# Altium PCB Boost.PcbDoc
Units mm, origin at the board's own origin, x right, y up, seen from the top; angles counter-clockwise.
Board outline 62.99 x 26.8 mm, 2 copper layers (Top Layer, Bottom Layer); 20 components, 12 nets, 51 pads, 2 vias.
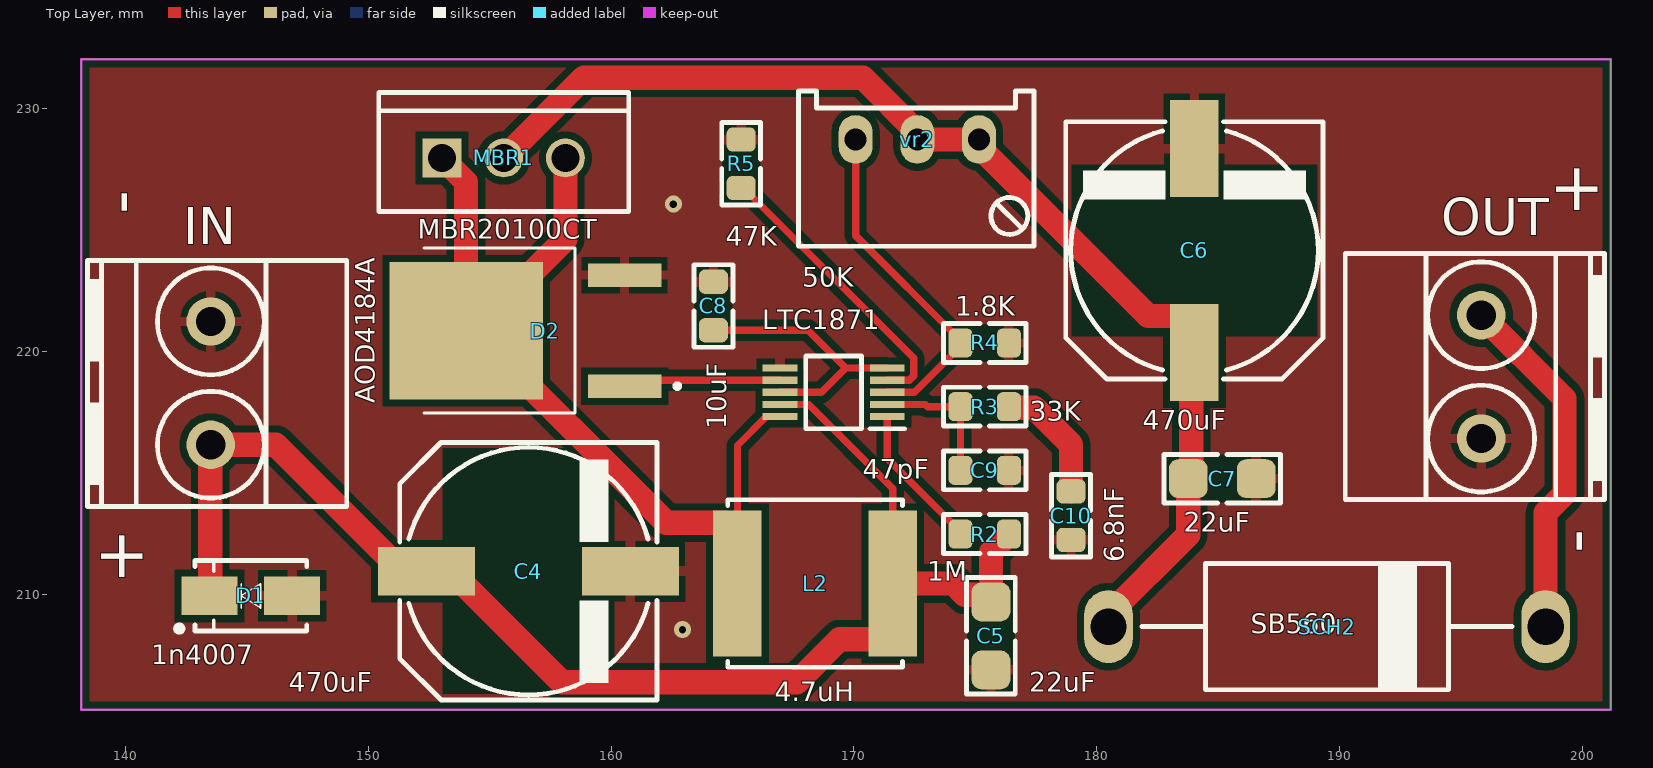
[diagram p0: Top Layer view]
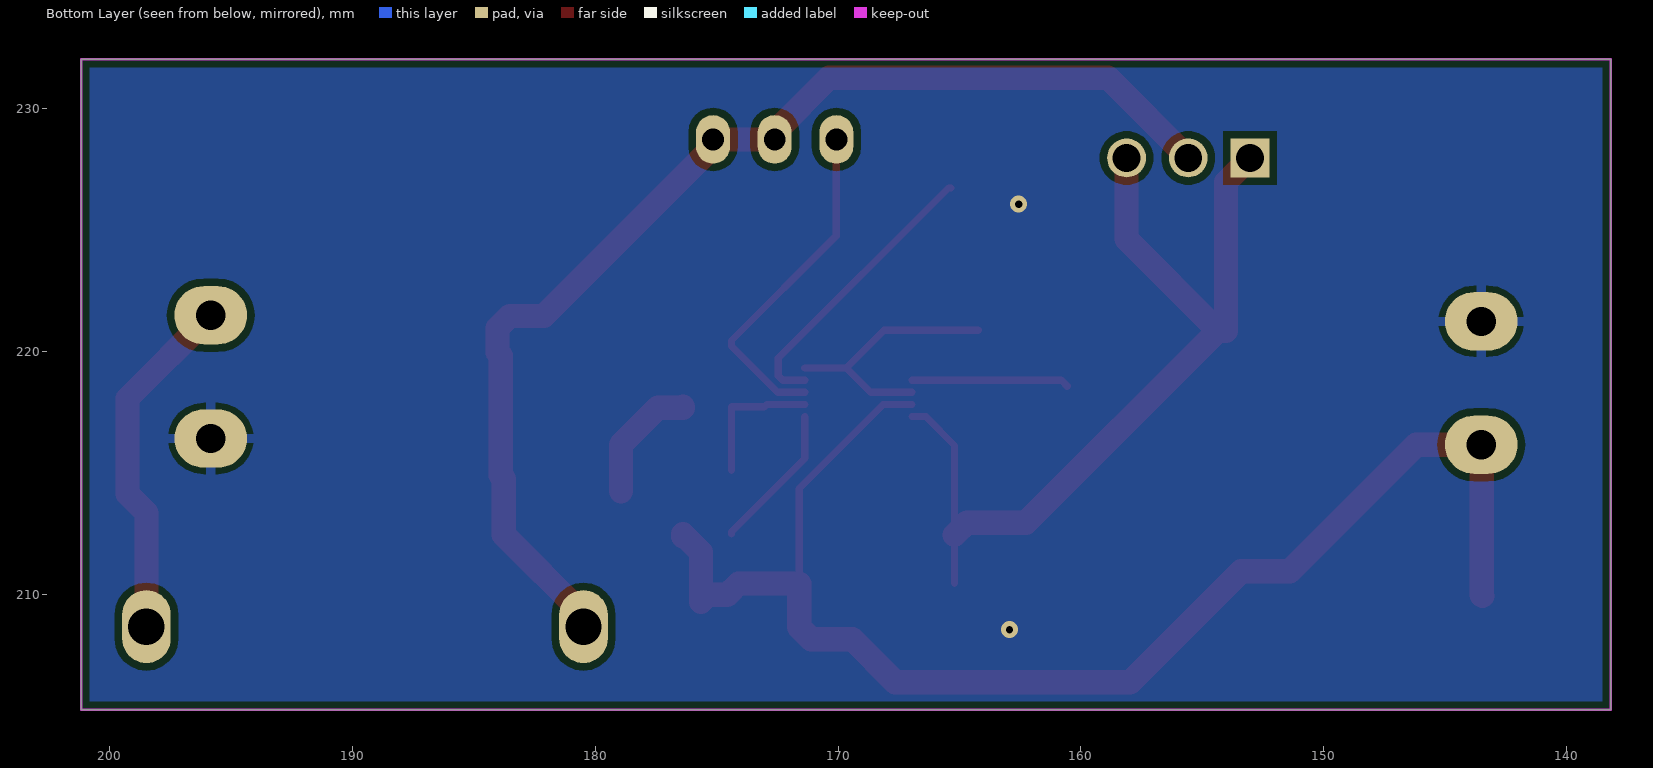
[diagram p1: Bottom Layer view, seen from below]
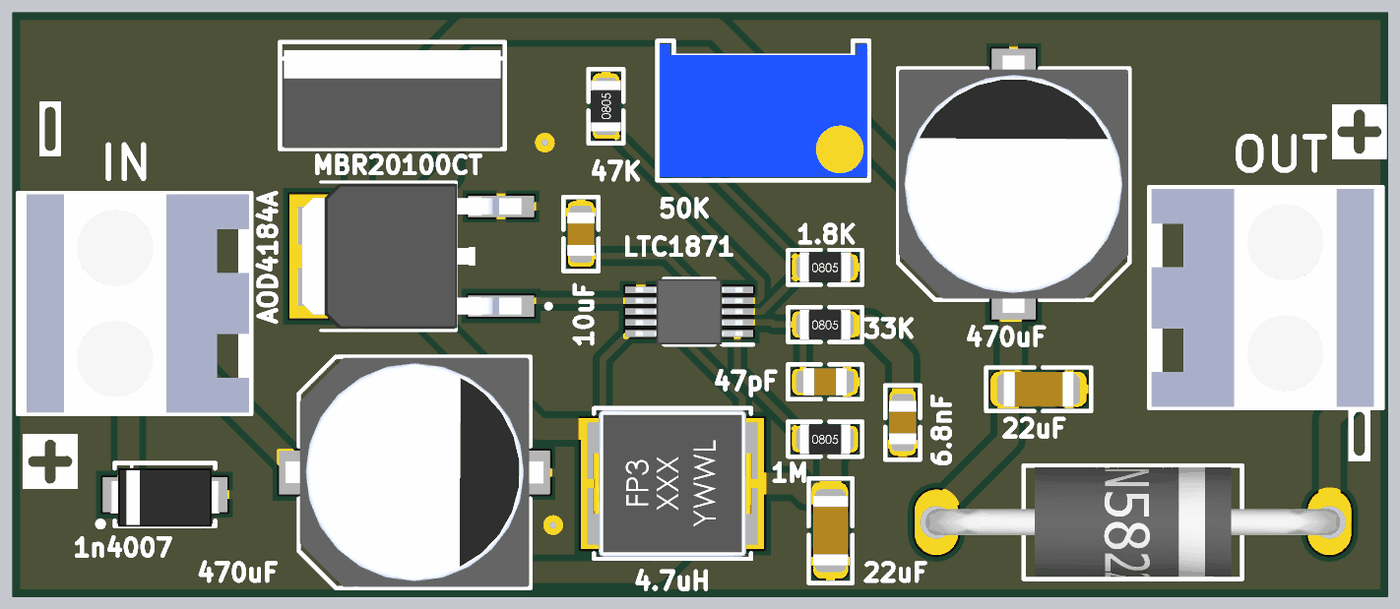
[diagram p2: 3D render of the assembled board from above, using the file's embedded part models]

## Layer stack, top to bottom
Top Solder: solder mask 0.0102, Solder Resist, Dk 3.5
Top Layer: signal copper 0.0356
Dielectric 1: dielectric 0.32, FR-4, Dk 4.8
Bottom Layer: signal copper 0.0356
Bottom Solder: solder mask 0.0102, Solder Resist, Dk 3.5

## Board outline
138.176,205.232 138.176,232.029 201.168,232.029 201.168,205.232

## Design rules (kind name [scope] priority, off if disabled: settings)
Clearance Clearance_2 [InNamedPolygon('GND_L02_P003')] p1: gap=0.3 ignorepadtopadclearanceinfootprint=FALSE
Clearance Clearance_1 [InNamedPolygon('GND_L01_P002')] p2: gap=0.3 ignorepadtopadclearanceinfootprint=FALSE
Clearance [All] p3: gap=0.2 ignorepadtopadclearanceinfootprint=FALSE
PolygonConnect PolygonConnect_5 [All vs IsNamedPolygon('GND_L02_P003')] p1: connectstyle=Relief reliefconductorwidth=0.4 reliefentries=4 polygonreliefangle="90 Angle" airgapwidth=0.254
PolygonConnect PolygonConnect_4 [All vs IsNamedPolygon('GND_L01_P002')] p2: connectstyle=Relief reliefconductorwidth=0.4 reliefentries=4 polygonreliefangle="90 Angle" airgapwidth=0.254
PolygonConnect PolygonConnect_3 [All vs IsNamedPolygon('GND_L01_P002')] p3: connectstyle=Relief reliefconductorwidth=0.254 reliefentries=4 polygonreliefangle="90 Angle" airgapwidth=0.4
PolygonConnect PolygonConnect_2 [All vs IsNamedPolygon('NONET_L01_P-001')] p4: connectstyle=Direct reliefconductorwidth=0.254 reliefentries=4 polygonreliefangle="90 Angle" airgapwidth=0.254
PolygonConnect PolygonConnect_1 [All vs IsNamedPolygon('NONET_L01_P-001')] p5: connectstyle=Direct reliefconductorwidth=0.254 reliefentries=4 polygonreliefangle="90 Angle" airgapwidth=0.254
PolygonConnect [All] p6: connectstyle=Relief reliefconductorwidth=0.254 reliefentries=4 polygonreliefangle="90 Angle" airgapwidth=0.254
RoutingVias [All] p1: holewidth=0.3 width=0.7 viastyle="Through Hole" minholewidth=0.3 minwidth=0.7 maxholewidth=0.3 maxwidth=0.7
SolderMaskExpansion [All] p1: expansion=0.102 istentingtop=FALSE
Width [All] p1: maxlimit=2 minlimit=0.2 preferedwidth=0.5 minimp=50.000000 maximp=50.000000 favimp=50.000000
30 further rules are at their usual default settings.

## Components (designator, comment, footprint, x,y, rotation, side; value= is the part's Value field where it differs from the comment)
C4 "470uF" C_EL_10_10 156.591,210.947 r0 top
C5 "22uF" C1206 175.641,208.28 r90 top
C6 "470uF" C_EL_10_10 184.023,224.155 r90 top
C7 "22uF" C1206 185.166,214.757 r180 top
C8 "10uF" C0805 164.211,221.869 r90 top
C9 "47pF" C0805 175.387,215.098 r0 top
C10 "6.8nF" C0805 178.943,213.233 r270 top
D1 "1n4007" DIOM4629X24N 145.161,209.931 r180 top
D2 "AOD4184A" DPAK228P994X240-4N 156.464,220.853 r90 top
IN "CONN_TB2" TBG_2 143.51,218.694 r90 top
L2 "4.7uH" L_7 168.402,210.439 r0 top
LTC1871 "LTC1871HMS#PBF" SOP50P490X110-10N 169.164,218.313 r180 top
MBR1 "MBR20100CT" TO220 155.575,227.965 r0 top
OUT "CONN_TB2" TBG_2 195.834,218.948 r270 top
R2 "1M" R0805 175.387,212.474 r0 top
R3 "33K" R0805 175.387,217.721 r0 top
R4 "1.8K" R0805 175.387,220.345 r0 top
R5 "47K" R0805 165.354,227.727 r90 top
SCH2 "SB560" D_AX07_DO27 189.484,208.661 r0 top
vr2 "50K" POT_3296W 172.609,228.727 r180 top

## Footprints (in the part's own frame and the unit in brackets; to place one, negate y for a bottom-side part, rotate by r counter-clockwise, add the part's x,y. Pads: shape width x height; smd on the part's side, far side on the other; paste and mask are expansions set on the pad)
C0805 [mm] "CHIP Capacitor, 2.0X1.3mm, 0805"
  rrect50% 1x1.2 smd paste-5 mask+0.075: 1(-1,0) 2(1,0)
  Top Layer pour cut-out: -0.5,0.8 0.5,0.8 0.5,-0.8 -0.5,-0.8
  silkscreen extent -1.7,-0.8 1.7,0.8, body extent -1,-0.62 1,0.63, height 1
C1206 [mm] "CHIP Capacitor, 3.2X1.6mm, 1206"
  rrect50% 1.6x1.6 smd paste-5 mask+0.075: 1(-1.4,0) 2(1.4,0)
  Top Layer pour cut-out: -0.8,1 -0.8,-1 0.8,-1 0.8,1
  silkscreen extent -2.4,-1 2.4,1, body extent -1.6,-0.8 1.6,0.8, height 1
C_EL_10_10 [mm] "Electrolytic Cap, 10.3mm, L: 10mm"
  rect 4x2 smd: 1(-4.2,0) 2(4.2,0)
  Top Layer pour cut-out: -3.556,5.08 -3.556,-5.08 3.556,-5.08 3.556,5.08
  silkscreen extent -5.3,-5.3 5.3,5.3, body extent -5.9,-5.25 5.9,5.25, height 10.5
D_AX07_DO27 [mm] "DIODE 0.7 INCH SPACING DO-201AD, DO-27"
  oval 2x3 hole 1.5: 1(-9,0) 2(9,0)
  silkscreen extent -7.62,-2.6 7.62,2.6, body extent -9.49,-2.5 9.49,2.52, height 5.01
DIOM4629X24N [mm] "Molded Diode, 2-Leads, Body 4/60x2/90mm, IPC Medium Density-Design:Abbas Basereh"
  rect 2.3x1.6 smd: 1(-1.7,0) 2(1.7,0)
  silkscreen extent -2.3,-1.45 3.07,1.47, body extent -2.5,-1.22 2.5,1.48, height 2.2
DPAK228P994X240-4N [mm]
  rect 0.97x3.02 smd: 1(-2.286,-4.09) 3(2.286,-4.09)
  rect 5.67x6.32 smd paste-4: 4(0,2.44)
  silkscreen extent -3.4,-6.36 3.4,4.18, body extent -3.3,-5.02 3.3,5.02, height 2.4
L_7 [mm] "INDUCTOR, 7.2X6.9mm, 7.1X6.5mm, SPM6530"
  rect 2x6 smd paste-3: 1(-3.2,0) 2(3.2,0)
  silkscreen extent -3.6,-3.45 3.6,3.45, body extent -3.62,-3.35 3.63,3.35, height 3
POT_3296W [mm] "POT, TRIM, 10.0X5.0mm, pitch: 2.5mm 3299W 3296W S64W"
  oval 1.4x2 / inner round 1.2 / far side oval 1.4x2 hole 0.9: 1(-2.54,0) 2(0,0) 3(2.54,0)
  silkscreen extent -4.8,-2 4.9,4.4, body extent -4.73,-1.85 4.8,4.25, height 11.56
R0805 [mm] "CHIP RESISTOR 1/8 WATT ,2.0X1.3mm, 0805, 2012"
  rrect50% 1x1.2 smd paste-5 mask+0.075: 1(-1,0) 2(1,0)
  Top Layer pour cut-out: -0.5,0.8 0.5,0.8 0.5,-0.8 -0.5,-0.8
  silkscreen extent -1.7,-0.8 1.7,0.8, body extent -1.15,-0.67 1.15,0.68, height 0.76
SOP50P490X110-10N [mm]
  rect 1.425x0.3 smd: 1(-2.212,1) 2(-2.212,0.5) 3(-2.212,0) 4(-2.212,-0.5) 5(-2.212,-1) 6(2.212,-1) 7(2.212,-0.5) 8(2.212,0) 9(2.212,0.5) 10(2.212,1)
  silkscreen extent -2.93,-1.5 1.15,1.5, body extent -2.45,-1.5 2.45,1.5, height 1.1
TBG_2 [mm] "Terminal Block Green"
  round 2 / inner round 2 / far side oval 2.4x3 hole 1.2: 1(-2.54,0) 2(2.54,0)
  silkscreen extent -5.08,-5.6 5.05,5.08, body extent -5,-5.5 5,5, height 14
TO220 [mm] "TO220"
  rect 1.6x1.6 hole 1.143: 1(-2.54,0)
  round 1.6 hole 1.143: 2(0,0) 3(2.54,0)
  silkscreen extent -5.15,-2.2 5.15,2.7, body extent -4.95,-2.16 4.95,2.34, height 20.8

## Part data
C4 C6: library part CAP_SMD_EL, "CAP, THD, ELEC,", ASSEMBLY=ASSEMBLY, DESC=DESCRIPTION, DIST#=MOUSER, MANF=MANF, MANF_P#=MANF_PART#, PARAM=20%, PARAM2=-V, PRICE="10= -$"
C5 C7 C8 C9 C10: library part CAP_SMD_MLCC, "CAP, MLCC, 1nF, 50V, C0G, 10%, 0402", ASSEMBLY=ASSEMBLY, DESC="CAP, MLCC, 1nF, 50V, C0G, 10%, 0402", MANF=Murata, MANF_P#=MANF_PART#, PARAM="C0G, 10%", PARAM2=50V, PRICE="100= 1$"
D1: library part "1n4007 SMD M7", "Standard Rectifiers", Manufacturer="DC COMPONENTS", Data=16-12-2016, Designer="Abbas Basereh", Link=http://www.tme.eu/en/details/m7/smd-universal-diodes/dc-components/, Part. No=M7
D2: "N-Channel 40 V 13A (Ta), 50A (Tc) 2.3W (Ta), 50W (Tc) Surface Mount TO-252 (DPAK)", Package=None, Check_prices=https://www.snapeda.com/parts/AOD4184A/Alpha+%2526+Omega+Semiconductor+Inc./view-part/?ref=eda, MF="Alpha & Omega Semiconductor Inc.", MP=AOD4184A, SnapEDA_Link=https://www.snapeda.com/parts/AOD4184A/Alpha+%2526+Omega+Semiconductor+Inc./view-part/?ref=snap
IN OUT: "CONN, TERMINAL BLOCK, 5.08mm pitch"
L2: library part INDPWR_SMD, "INDUCTOR, POWER, SMD"
LTC1871: "Integrated Circuit", Manufacturer_Name="Analog Devices", Mouser Part Number=584-LTC1871HMS#PBF, Arrow Part Number=LTC1871HMS#PBF, Arrow Price/Stock=https://www.arrow.com/en/products/ltc1871hmspbf/analog-devices?region=europe, Datasheet Link=http://cds.linear.com/docs/en/datasheet/1871fe.pdf, Height=1.1mm, Manufacturer_Part_Number=LTC1871HMS#PBF, Mouser Price/Stock=https://www.mouser.co.uk/ProductDetail/Analog-Devices/LTC1871HMSPBF?qs=hVkxg5c3xu%252Bzf5rGR7%2FEaA%3D%3D
MBR1: "SCHOTTKY BARRIER 20 AMPERES 80−100 VOLTS"
R2 R3 R4 R5: library part RES_SMD_0805, "RESISTOR, SMD", ASSEMBLY=ASSEMBLY, DESC=DESCRIPTION, DIST#=MOUSER, MANF=-, MANF_P#=-, PARAM=-W, PARAM2=1%, PRICE="100= 0.5$"
SCH2: library part DIODE_THD, "DIODE, THD", ASSEMBLY=ASSEMBLY, DESC=DESCRIPTION, MANF=MANF, MANF_P#=1N4001, PARAM=100V, PARAM2=1A, PRICE=PRICE
vr2: library part RES_THD_POT_MULTITURN, "RESISTOR, THD, Potentiometer Multiturn, most Popular"

## Via types
v1: diameter 0.7, hole 0.3, Top Layer to Bottom Layer, 2 vias

## Nets (pads, with @x,y where several pads share a name; then routed paths per layer and width w, separated by ;. In a path a pad name is that pad's centre, name@x,y a point inside that pad or via, vN(x,y) a via of type N, cw(c..) or ccw(c..) an arc to the next point about the centre after c; other vN are vias at no path point)
GND: C4.2 C5.1 C6.2 C7.1 C8.2 C9.2 C10.2 D1.1 D2.3 IN.2 LTC1871.6 OUT.2 R4.2 R5.2
  other v1: 162.941,208.534 162.56,226.06
NetC4_1: C4.1 C5.2 D1.2 IN.1 L2.2 LTC1871.9 R2.2 | length 58.6
  Top Layer w0.3: LTC1871.9 168.14,217.813 171.602,214.351 L2.2
  Top Layer w1: D1.2 143.485,209.956 143.485,216.13 IN.1 146.184,216.154 151.391,210.947 C4.1 153.391,210.947 157.963,206.375 167.64,206.375 169.406,208.141 171.102,208.141 171.602,208.641 L2.2 174.102,210.439 174.561,209.98 175.341,209.98 C5.2 175.641,211.728 176.287,212.374 176.387,212.374 R2.2
NetC6_1: C6.1 C7.2 MBR1.2 SCH2.1 vr2.1 vr2.2 | length 48.2
  Top Layer w1: MBR1.2 158.877,231.267 170.369,231.267 172.609,229.027 vr2.2 vr2.1 175.149,228.427 182.121,221.455 183.523,221.455 184.023,220.955 C6.1 183.894,219.826 183.894,214.885 C7.2 183.766,212.443 180.484,209.161 SCH2.1
NetC8_1: C8.1 LTC1871.5 LTC1871.8 | length 10.9
  Top Layer w0.3: C8.1 168.108,220.869 169.664,219.313 ; LTC1871.8 168.664,218.313 169.664,219.313 ; LTC1871.5 169.664,219.313
NetC9_1: C9.1 LTC1871.2 R3.1 | length 5.7
  Top Layer w0.3: LTC1871.2 172.946,217.813 173.037,217.721 R3.1 C9.1
NetC10_1: C10.1 R3.2 | length 5.2
  Top Layer w1: R3.2 176.387,217.678 177.419,217.678 178.943,216.154 C10.1
NetD2_1: D2.1 LTC1871.7 | length 6.5
  Top Layer w0.3: D2.1 160.8,218.813 LTC1871.7
NetD2_4: D2.4 L2.1 LTC1871.10 MBR1.1 MBR1.3 | length 38.8
  Top Layer w0.3: L2.1 165.202,212.439 165.202,216.125 166.389,217.313 LTC1871.10
  Top Layer w1: MBR1.1 154.024,226.976 D2.4 D2.4@154.349,220.853 ; MBR1.3 158.115,224.619 D2.4@154.349,220.853 ; L2.1@165.202,212.439 164.702,212.939 162.263,212.939 D2.4@154.349,220.853
NetLTC1871_1: LTC1871.1 R2.1 | length 6.1
  Top Layer w0.3: LTC1871.1 171.376,215.585 174.387,212.574 R2.1
NetLTC1871_3: LTC1871.3 R4.1 vr2.3 | length 14.1
  Top Layer w0.3: vr2.3 170.069,224.763 174.387,220.445 R4.1 174.387,220.211 172.489,218.313 LTC1871.3
NetLTC1871_4: LTC1871.4 R5.1 | length 11.9
  Top Layer w0.3: R5.1 165.454,226.727 172.458,219.723 172.458,218.989 172.282,218.813 LTC1871.4
NetOUT_1: OUT.1 SCH2.2 | length 14.6
  Top Layer w1: OUT.1 199.263,218.059 199.263,214.135 198.484,213.356 SCH2.2

## Polygon pours and split planes (outlines as drawn)
GND on Top Layer "GND_L01_P002" (solid, pour order 2): 138.176,205.232 138.176,232.029 201.168,232.029 201.168,205.232
GND on Bottom Layer "GND_L02_P003" (solid, pour order 3): 138.176,205.232 138.176,232.029 201.168,232.029 201.168,205.232

## Keep-outs
Keep-Out Layer:
  the board outline again, w0.1

## Silkscreen, mask and mechanical layers (free items; w line width, h text height)
Top Overlay:
  text "-" at 140.7,225.648 h2 r90
  text "+" at 200.644,225.521 h2 r90
  text "-" at 200.644,211.678 h2 r90
  text "+" at 140.7,210.408 h2 r90